# Allegro board 600-90527-01_CYW920719WCD1_REV2.0.brd
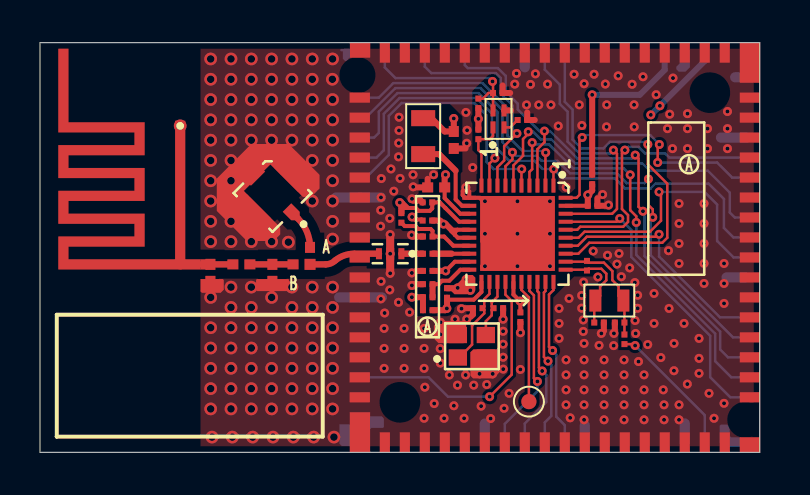
[diagram p0: board, top side]
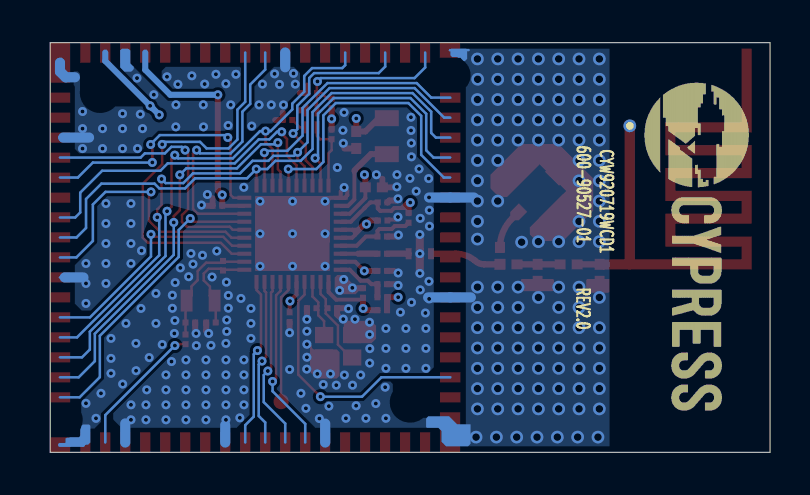
[diagram p1: board, bottom side, seen from below]

Outline 36 x 20.5 mm; copper layers: TOP, L02_GND, L03_PWR-GND, BOTTOM. Coordinates in mm from the lower left corner of the outline.
Outline path: 0,20.5 0,0 36,0 36,20.5 0,20.5

## Design rules (mm)
net group DP1: nets N16797345 N16797359
net group ANT: nets N16796101
net group PWR: nets 1P2VRF CBUCK_OUT N16792151 N16794447 VBAT VDDIO

## Placement (name value [footprint] x y rotation side)
A1  #  [ANT_ETCH_MIFA-0000_01]  6 13.15 90 top
C1  -  [CAPC0603_IS0201Q]  27.64 12.34 0 top
C3  -  [CAPC1005_IS0402Q]  20.69 15.63 270 top
C4  -  [CAPC1005_IS0402Q]  19.81 13.26 180 top
C5  -  [CAPC0603_IS0201Q]  19.39 10.8 0 top
C6  -  [CAPC0603_IS0201Q]  19.38 11.6 0 top
C7  -  [CAPC0603_IS0201Q]  19.38 12.51 180 top
C8  -  [CAPC0603_IS0201Q]  19.39 9.08 180 top
C10  -  [CAPC0603_IS0201Q]  22.92 7.21 0 top
C11  -  [CAPC0603_IS0201Q]  21.89 7.21 180 top
C14  -  [CAPC0603_IS0201Q]  24.03 6.76 270 top
C16  -  [CAPC0603_IS0201Q]  19.39 8.41 180 top
C18  -  [CAPC0603_IS0201Q]  20.36 7.97 90 top
C19  -  [CAPC0603_IS0201Q]  27.96 6.49 0 top
C20  -  [CAPC0603_IS0201Q]  28.99 6.49 180 top
C43  -  [CAPC0603_IS0201Q]  19.39 9.94 0 top
C61  -  [CAPC0603_IS0201Q]  24.13 16.63 0 top
C67  -  [CAPC1005_IS0402Q_OPT_AB_RA_M]  13.5 9.4 180 top
C68  -  [CAPC0603_IS0201Q]  22.9 17.98 0 top
FB1  -  [INDC0603_IS0201Q]  19.39 7.11 0 top
FB2  -  [INDC0603_IS0201Q]  19.39 7.76 0 top
FL1  -  [FILS3_MUR_LFB182G45Q]  17.51 9.94 180 top
J3  -  [AMPHL_A-1JB_ALT1]  11.63 12.97 45 top
L1  -  [BKPX_201210]  19.16 15.82 90 top
LC1  -  [CAPC1005_IS0402Q]  10.07 9.4 0 top
LC2  -  [CAPC1005_IS0402Q]  8.52 8.98 270 top
LC3  -  [CAPC1005_IS0402Q]  11.62 8.98 270 top
NOREF  -  []  -5.59 85.63 0 top
NOREF#2  -  []  361.74 -145.39 0 top
NOREF#3  -  []  36 0 90 top
NOREF#4  -  []  -336.76 -224.13 0 top
NOREF#5  -  []  -34.5 -53.95 0 top
NOREF#6  -  []  0 20.5 0 top
NOREF#7  -  []  82.34 42.57 0 top
NOREF#8  -  []  127.87 -9.4 90 top
NOREF#9  -  []  71.05 171.68 0 top
NOREF#10  -  []  361.74 -145.39 180 bottom
R1  -  [RESC0603_IS0201Q]  27.62 13.66 270 top
R9  -  [RESC0603_IS0201Q]  29.23 5.65 90 top
R15  -  [RESC0603_IS0201Q]  18.07 11.73 270 top
R16  -  [RESC0603_IS0201Q]  27.36 9.34 270 top
R82  -  [RESC0603_IS0201Q]  21.93 15.91 90 top
R83  -  [RESC0603_IS0201Q]  21.93 17.46 90 top
TP4  -  [TP-SMT-040-SQR]  24.45 2.54 270 top
U1  -  [QFN40P500X500_40_HS370_BCM]  23.88 10.94 270 top
U2  -  [QFN_36X18_5_64-0718]  17.25 0.49 90 top
U4  -  [XC6119_USPN4]  22.93 16.69 0 top
Y2  #  [9H03270044_2X1M2]  28.47 7.59 0 top
Y3  -  [XTALS4_2M0X1M6]  21.6 5.31 90 top

## Library data of the parts
A1 = ANT_ETCH_MIFA-0000_01: Tolerance: ?; User Part Number: *********; room: RF
C1 C14 C61 C68 = CAPC0603_IS0201Q: User Part Number: Part No; room: BASEBAND
C3 C4 LC1-LC3 = CAPC1005_IS0402Q: User Part Number: Part No; room: RF
C5-C8 C10 C11 C16 C18-C20 C43 = CAPC0603_IS0201Q: User Part Number: Part No; room: RF
C67 = CAPC1005_IS0402Q_OPT_AB_RA_M: User Part Number: Part No; room: RF
FB1 FB2 = INDC0603_IS0201Q: User Part Number: Part No; room: RF
FL1 = FILS3_MUR_LFB182G45Q: User Part Number: Part No; room: RF
J3 = AMPHL_A-1JB_ALT1: User Part Number: Part No; room: RF
L1 = BKPX_201210: User Part Number: Part No; room: RF
R1 R82 R83 = RESC0603_IS0201Q: User Part Number: Part No; room: BASEBAND
R9 R15 R16 = RESC0603_IS0201Q: User Part Number: Part No; room: RF
TP4 = TP-SMT-040-SQR: User Part Number: PART NUMBER; Tolerance: TOLERANCE; room: BASEBAND
U1 = QFN40P500X500_40_HS370_BCM: User Part Number: Part No; room: BASEBAND
U2 = QFN_36X18_5_64-0718
U4 = XC6119_USPN4: User Part Number: Part No; room: BASEBAND
Y2 = 9H03270044_2X1M2: Tolerance: ?; User Part Number: *********; room: RF
Y3 = XTALS4_2M0X1M6: User Part Number: Part No; room: RF

## Footprints (pads in the part's own frame, mm; a bottom-side part is the same pattern mirrored in y, then rotated)
9H03270044_2X1M2
  rect 0.6x1.1 smd: 1(-0.7,0) 2(0.7,0)
AMPHL_A-1JB_ALT1
  rect 0.75x1.7 smd: G1(-1.325,0) G3(1.325,0)
  rect 1x1 smd: G2(0,1.524)
  custom 0.6x0.75 smd: S(0,-1.399)
ANT_ETCH_MIFA-0000_01
  round 0.635 smd: FEED(-3.683,-1.016)
  round 0.635 hole 0.381: GND(3.188,-1.016)
BKPX_201210
  rect 0.8x1.2 smd: 1(-0.9,0) 2(0.9,0)
CAPC0603_IS0201Q
  rect 0.3x0.3 smd: 1(-0.24,0) 2(0.24,0)
CAPC1005_IS0402Q
  rect 0.55x0.5 smd: 1(-0.425,0) 2(0.425,0)
CAPC1005_IS0402Q_OPT_AB_RA_M
  rect 0.5x0.55 smd: A(0,-0.85)
  rect 0.55x0.5 smd: B(0.85,0)
  rect 0.55x0.55 smd: C(0,0)
FILS3_MUR_LFB182G45Q
  rect 0.3x0.55 smd: 1(-0.56,0) 3(0.56,0)
  rect 0.4x0.6 smd: 2(0,0)
INDC0603_IS0201Q
  rect 0.3x0.3 smd: 1(-0.24,0) 2(0.24,0)
QFN40P500X500_40_HS370_BCM
  rect 0.7x0.2 smd: 1(-2.41,1.8) 2(-2.41,1.4) 3(-2.41,1) 4(-2.41,0.6) 5(-2.41,0.2) 6(-2.41,-0.2) 7(-2.41,-0.6) 8(-2.41,-1) 9(-2.41,-1.4) 10(-2.41,-1.8) 21(2.41,-1.8) 22(2.41,-1.4) 23(2.41,-1) 24(2.41,-0.6) 25(2.41,-0.2) 26(2.41,0.2) 27(2.41,0.6) 28(2.41,1) 29(2.41,1.4) 30(2.41,1.8)
  rect 0.2x0.7 smd: 11(-1.8,-2.41) 12(-1.4,-2.41) 13(-1,-2.41) 14(-0.6,-2.41) 15(-0.2,-2.41) 16(0.2,-2.41) 17(0.6,-2.41) 18(1,-2.41) 19(1.4,-2.41) 20(1.8,-2.41) 31(1.8,2.41) 32(1.4,2.41) 33(1,2.41) 34(0.6,2.41) 35(0.2,2.41) 36(-0.2,2.41) 37(-0.6,2.41) 38(-1,2.41) 39(-1.4,2.41) 40(-1.8,2.41)
  rect 3.7x3.7 smd: H(0,0)
QFN_36X18_5_64-0718
  rect 1.016x0.508 smd: 63(0,0) 64(0,-1) 65(0,-2) 66(0,-3) 67(0,-4) 68(0,-5) 69(0,-6) 70(0,-7) 71(0,-8) 72(0,-9) 73(0,-10) 74(0,-11) 75(0,-12) 76(0,-13) 77(0,-14) 78(0,-15) 79(0,-16) 80(0,-17) 97(19.516,-17) 98(19.516,-16) 99(19.516,-15) 100(19.516,-14) 101(19.516,-13) 102(19.516,-12) 103(19.516,-11) 104(19.516,-10) 105(19.516,-9) 106(19.516,-8) 107(19.516,-7) 108(19.516,-6) 109(19.516,-5) 110(19.516,-4) 111(19.516,-3) 112(19.516,-2) 113(19.516,-1) 114(19.516,0)
  rect 0.508x1.016 smd: 81(2.26,-18.261) 82(3.26,-18.261) 83(4.26,-18.261) 84(5.26,-18.261) 85(6.26,-18.261) 86(7.26,-18.261) 87(8.26,-18.261) 88(9.26,-18.261) 89(10.26,-18.261) 90(11.26,-18.261) 91(12.26,-18.261) 92(13.26,-18.261) 93(14.26,-18.261) 94(15.26,-18.261) 95(16.26,-18.261) 96(17.26,-18.261) 115(17.26,1.254) 116(16.26,1.254) 117(15.26,1.254) 118(14.26,1.254) 119(13.26,1.254) 120(12.26,1.254) 121(11.26,1.254) 122(10.26,1.254) 123(9.26,1.254) 124(8.26,1.254) 125(7.26,1.254) 126(6.26,1.254) 127(5.26,1.254) 128(4.26,1.254) 129(3.26,1.254) 130(2.26,1.254)
  rect 2.007x1.016 smd: HS5(0.509,1.245) HS7(19.009,-18.26)
  rect 0.762x1.016 smd: HS6(-0.123,-18.26) HS8(19.639,1.24)
RESC0603_IS0201Q
  rect 0.3x0.3 smd: 1(-0.24,0) 2(0.24,0)
TP-SMT-040-SQR
  round 0.762 smd: 1(0,0)
XC6119_USPN4
  rect 0.25x0.6 smd: 1(-0.275,-0.425) 2(0.275,-0.425) 3(0.275,0.425) 4(-0.275,0.425)
XTALS4_2M0X1M6
  rect 0.813x0.914 smd: 1(-0.563,0.7) 2(-0.563,-0.7) 3(0.563,-0.7) 4(0.563,0.7)

## Nets
GND: A1.FEED A1.GND C1.2 C3.2 C4.2 C5.1 C6.1 C7.2 C8.2 C10.2 C11.2 C14.2 C16.2 C18.2 C19.2 C20.2 C61.2 C68.2 FL1.2 J3.G1 J3.G2 J3.G3 LC1.1 LC2.1 LC2.2 LC3.2 U1.11 U1.H U2.68 U2.73 U2.78 U2.80 U2.87 U2.94 U2.99 U2.107 U2.120 U2.125 U2.HS5 U2.HS6 U2.HS7 U2.HS8 U4.3 Y3.2 Y3.4
VBAT: C4.1 U1.13 U2.98
VDDIO: R1.1 R82.2 R83.1 U2.100
1P2VRF: C7.1 FB1.1 FB2.1 R15.1 U1.14
BT_RFIO: C43.2 U1.18
BT_UART_CTS: U1.30 U2.72
BT_UART_RTS: U1.29 U2.71
BT_UART_RX: U1.27 U2.69
BT_UART_TX: U1.28 U2.70
CBUCK_OUT: C3.1 C6.2 L1.2 U1.15 U1.16
EXT_LPO: R9.1 U2.79
HOST_WAKE: U1.24 U2.129
P0: U1.3 U2.83 U2.110
P1: U1.4 U2.82
P2: U1.34 U2.85
P4: U1.35 U2.88
P6: U1.36 U2.93
P7: U1.37 U2.81
P10: U1.40 U2.92
P16: U1.33 U2.105
P17: U1.38 U2.106
P25: U1.8 U2.112
P26: U1.7 U2.84 U2.116
P28: U1.1 U2.89 U2.117
P29: U1.2 U2.115
P33: U1.9 U2.118
P34: U1.5 U2.119
P38: U1.6 U2.90
PAVDD: C5.2 R15.2 U1.17
RST_N: C68.1 R83.2 U2.114 U4.4
N16791364: C1.1 C14.1 R1.2 U1.25 U1.39
N16791782: TP4.1 U1.26
N16792151: C16.1 FB2.2 U1.20
N16792311: C8.1 C18.1 FB1.2 U1.19 U1.21
N16794447: L1.1 U1.12
N16796101: C67.B LC1.2 LC3.1
N16797345: C20.1 R9.2 R16.1 U1.32 Y2.2
N16797359: C19.1 R16.2 U1.31 Y2.1
N16808527: R82.1 U1.10 U4.1
N16808543: C61.1 U4.2
N16812960: C43.1 FL1.1
N16812974: C67.C FL1.3
N16813232: C67.A J3.S
N16813357: C11.1 U1.22 Y3.1
N16813361: C10.1 U1.23 Y3.3

Pads without a net: U2 63 64 65 66 67 74 75 76 77 86 91 95 96 97 101 102 103 104 108 109 111 113 121 122 123 124 126 127 128 130

## Via types
v1: diameter 0.45, hole 0.2, TOP to BOTTOM, 252 vias
v2: diameter 0.635, hole 0.381, TOP to BOTTOM, 108 vias

## Routing (per net, layer and track width the routed paths; a pad name or vN(x,y) marks a point on that pad's centre or on a via; arc(x,y) is an arc through that point)
GND: length 31.6
  TOP w0.2: 11.62,8.05 11.62,8.55 ; 21.14,13.09 21.14,12.87 21.27,12.74 U1.11 ; U1.11 22.01,12.74 ; U1.11 21.47,13.07 ; v1(18.61,11.78) 18.74,11.65 19.09,11.65 C6.1 ; 23.16,6.63 v1(23.16,6.66)
  TOP w0.3: v1(18.6,8.35) 18.66,8.41 C16.2 ; C18.2 20.87,8.21 v1(20.89,8.23) ; 24.37,17.01 C61.2 24.74,16.63 ; 21.55,6.79 21.65,6.9 C11.2 21.1,7.21 v1(21.08,7.19) ; 27.88,12.72 C1.2 28.26,12.34 ; 23.52,17.98 C68.2 23.14,18.36 ; C10.2 v1(23.16,6.66) ; 18.59,12.69 18.68,12.6 19.04,12.6 19.13,12.51 C7.2 ; C8.2 18.81,9.08 ; U4.3 23.56,17.11 ; C14.2 v1(24.03,5.98) ; C5.1 18.66,10.8 v1(18.58,10.87) ; v1(28.07,5.95) 28.2,6.07 C19.2 ; 20.69,15.21 21.28,15.21 ; 19.39,13.69 C4.2 18.69,13.26 v1(18.66,13.29) ; C20.2 28.75,5.99 v1(28.7,5.95)
  TOP w0.318: LC1.1 LC2.1 7.08,9.4 A1.FEED
  TOP w0.4: v1(17.51,10.9) v1(17.51,9.94) v1(17.51,8.96)
  BOTTOM w0.125: U2.HS8 15.08,20.13 ; 35.27,8.75 U2.87
  BOTTOM w0.2: U2.HS6 34.37,0.37 U2.80 ; 35.35,15.75 U2.94
  BOTTOM w0.508: 34.06,15.75 35.35,15.75 ; U2.HS7 35.51,19.05 35.22,18.77 34.77,18.77 ; 27.25,1.36 U2.73 ; 17.1,7.75 U2.125 14.96,7.75 ; 14.81,12.75 U2.120 17.05,12.75 ; 22.25,1.43 U2.68 ; 34.34,8.75 35.27,8.75 ; U2.78 32.25,1.44 ; U2.107 24.25,19.27
  vias: v1(17.07,13.7) v1(17.05,12.76) v1(17.04,12.12) v1(17.03,11.31) v1(17.06,8.56) v1(17.05,7.68) v1(17.21,6.2) v1(17.21,5.2) v1(17.21,4.2) v1(17.24,6.97) v1(17.49,11.71) v1(17.49,8.13) v1(17.55,14.18) v1(17.69,13.07) v1(17.96,16.77) v1(17.95,16.11) v1(17.94,15.48) v1(17.93,14.79) v1(18.01,13.71) v1(17.93,7.5) v1(18.21,6.2) v1(18.21,5.2) v1(18.21,4.2) v1(18.48,7.01) v1(18.61,12.69) v1(18.6,8.98) v1(18.66,13.89) v1(19.21,6.2) v1(19.21,5.2) v1(19.21,4.2) v1(19.21,1.7) v1(19.25,3.26) v1(19.69,13.89) v1(19.71,2.44) v1(20.03,6.51) v1(20.02,5.9) v1(20.02,5.19) v1(20.02,4.46) v1(20.21,1.7) v1(20.47,3.87) v1(20.7,2.33) v1(20.76,6.66) v1(20.88,3.36) v1(21.21,1.7) v1(21.3,17.01) v1(21.3,13.25) v1(21.29,3.87) v1(21.36,16.12) v1(21.34,15.47) v1(21.32,8.65) v1(21.34,6.66) v1(21.52,8.1) v1(21.64,14.25) v1(21.69,3.36) v1(21.98,3.93) v1(22.06,2.31) v1(22.25,12.56) v1(22.25,10.94) v1(22.25,9.31) v1(22.34,3.39) v1(22.54,1.69) v1(22.64,3.93) v1(23.16,6.06) v1(23.16,5.41) v1(23.16,4.76) v1(23.17,4.16) v1(23.21,2.2) v1(23.46,2.95) v1(23.74,18.43) v1(23.83,18.96) v1(23.88,12.56) v1(23.88,10.94) v1(23.88,9.31) v1(24.03,4.15) v1(24.33,17.39) v1(24.53,18.41) v1(24.78,18.94) v1(24.94,17.39) v1(25.39,18.43) v1(25.5,12.56) v1(25.5,10.94) v1(25.5,9.31) v1(25.55,17.39) v1(25.92,16.33) v1(25.96,7.2) v1(25.96,6.45) v1(25.96,5.7) v1(26.32,13.26) v1(26.31,4.62) v1(26.31,3.87) v1(26.31,3.12) v1(26.31,2.38) v1(26.46,7.7) v1(26.52,1.72) v1(26.71,18.92) v1(26.97,17.39) v1(27.1,16.36) v1(27.09,7.85) v1(27.09,7.21) v1(27.19,8.51) v1(27.17,6.62) v1(27.17,6.05) v1(27.21,5.45) v1(27.21,4.62) v1(27.21,3.87) v1(27.21,3.12) v1(27.21,2.38) v1(27.21,1.62) v1(27.21,18.45) v1(27.67,10.07) v1(27.71,18.92) v1(27.9,8.77) v1(27.96,5.35) v1(28.14,12.9) v1(28.21,4.62) v1(28.21,3.87) v1(28.21,3.12) v1(28.21,2.38) v1(28.21,1.62) v1(28.27,18.43) v1(28.34,17.39) v1(28.33,16.29) v1(28.38,9.86) v1(28.43,12.37) v1(28.69,5.34) v1(28.86,9.42) v1(28.92,18.84) v1(28.96,9.95) v1(29.07,8.79) v1(29.21,4.62) v1(29.21,3.87) v1(29.21,3.12) v1(29.21,2.38) v1(29.21,1.62) v1(29.49,9.23) v1(29.61,18.42) v1(29.71,17.39) v1(29.72,16.29) v1(29.75,8.49) v1(29.76,6.59) v1(29.79,5.95) v1(29.89,7.86) v1(29.89,7.21) v1(29.93,4.54) v1(30.16,18.8) v1(30.21,3.87) v1(30.21,3.12) v1(30.21,2.38) v1(30.21,1.62) v1(30.4,5.39) v1(30.71,7.95) v1(30.71,6.45) v1(30.82,17.9) v1(31.05,4.74) v1(31.17,3.12) v1(31.21,2.38) v1(31.21,1.62) v1(31.38,16.2) v1(31.49,16.92) v1(31.43,10.09) v1(31.46,7.2) v1(31.66,18.73) v1(31.63,15.2) v1(31.71,4.08) v1(31.71,5.45) v1(31.96,12.45) v1(31.96,11.45) v1(31.96,10.45) v1(31.96,9.45) v1(31.96,2.38) v1(31.96,1.62) v1(32.21,6.45) v1(32.38,16.95) v1(32.38,16.2) v1(32.38,15.2) v1(32.38,3.41) v1(32.96,5.7) v1(32.96,4.7) v1(32.96,3.95) v1(33.21,12.45) v1(33.21,11.45) v1(33.21,10.45) v1(33.21,9.45) v1(33.21,8.45) v1(33.38,16.2) v1(33.38,15.2) v1(33.46,2.95) v1(33.71,1.7) v1(34.21,9.45) v1(34.21,8.45) v1(34.21,7.45) v1(34.21,2.45) v1(34.38,17.06) v1(34.38,16.2) v1(34.38,15.2) v2(8.54,19.69) v2(8.54,18.67) v2(8.54,17.66) v2(8.54,16.64) v2(8.54,15.62) v2(8.54,14.61) v2(8.54,13.59) v2(8.54,12.58) v2(8.54,11.56) v2(8.54,10.54) v2(8.54,7.75) v2(8.54,6.23) v2(8.54,5.22) v2(8.54,4.2) v2(8.54,3.19) v2(8.54,2.17) v2(8.6,0.76) v2(9.55,19.69) v2(9.55,18.67) v2(9.55,17.66) v2(9.55,16.64) v2(9.55,15.62) v2(9.55,14.61) v2(9.55,13.59) v2(9.55,11.56) v2(9.55,10.54) v2(9.55,8.27) v2(9.55,7.25) v2(9.55,6.23) v2(9.55,5.22) v2(9.55,4.2) v2(9.55,3.19) v2(9.55,2.17) v2(9.62,0.76) v2(10.57,19.69) v2(10.57,18.67) v2(10.57,17.66) v2(10.57,16.64) v2(10.57,15.62) v2(10.57,10.54) v2(10.57,8.27) v2(10.57,7.25) v2(10.57,6.23) v2(10.57,5.22) v2(10.57,4.2) v2(10.57,3.19) v2(10.57,2.17) v2(10.64,0.76) v2(11.58,19.69) v2(11.58,18.67) v2(11.58,17.66) v2(11.58,16.64) v2(11.58,15.62) v2(11.58,10.54) v2(11.58,7.75) v2(11.58,6.23) v2(11.58,5.22) v2(11.58,4.2) v2(11.58,3.19) v2(11.58,2.17) v2(11.65,0.76) v2(12.42,10.52) v2(12.6,19.69) v2(12.6,18.67) v2(12.6,17.66) v2(12.6,16.64) v2(12.6,15.62) v2(12.6,8.27) v2(12.6,7.25) v2(12.6,6.23) v2(12.6,5.22) v2(12.6,4.2) v2(12.6,3.19) v2(12.6,2.17) v2(12.67,0.76) v2(13.62,19.69) v2(13.62,18.67) v2(13.62,17.66) v2(13.62,16.64) v2(13.62,15.62) v2(13.62,14.61) v2(13.62,12.58) v2(13.62,8.27) v2(13.62,7.25) v2(13.62,6.23) v2(13.62,5.22) v2(13.62,4.2) v2(13.62,3.19) v2(13.62,2.17) v2(13.68,0.76) v2(14.63,19.69) v2(14.62,18.67) v2(14.63,17.66) v2(14.63,16.64) v2(14.63,15.62) v2(14.63,14.61) v2(14.63,13.59) v2(14.63,12.58) v2(14.63,11.56) v2(14.63,10.67) v2(14.63,8.27) v2(14.63,7.25) v2(14.63,6.23) v2(14.63,5.22) v2(14.63,4.2) v2(14.63,3.19) v2(14.63,2.17) v2(14.7,0.76)
VBAT: length 19.3
  TOP w0.2: U1.13 21.02,11.94 20.24,12.72 C4.1
  TOP w0.3: v1(20.28,13.89) 20.24,13.85 C4.1
  L03_PWR-GND w0.3: v1(31,17.34) 30.59,16.93 v1(30.55,16.89) 23.51,16.89 20.51,13.89 v1(20.28,13.89)
  BOTTOM w0.3: v1(31,17.34) 30.88,17.23 ; 30.88,17.23 30.59,16.93 v1(30.55,16.89) ; 30.88,17.23 33.25,19.59 U2.98
VDDIO: length 16.3
  TOP w0.3: v1(27.62,17.89) R1.1 ; R83.1 v1(21.93,16.69) R82.2
  L03_PWR-GND w0.3: v1(27.62,17.89) 23.13,17.89 v1(21.93,16.69)
  BOTTOM w0.3: v1(27.62,17.89) 29.99,17.89 31.25,19.14 U2.100
1P2VRF: length 11.6
  TOP w0.2: 18.42,12.23 18.08,12.23 18.07,12.22 ; 18.42,12.23 18.79,12.23 18.94,12.08 19.49,12.08 19.62,12.21 C7.1 19.99,12.51 20.28,12.22 20.96,11.54 U1.14 ; 18.42,12.23 18.15,12.5 v1(17.99,12.5)
  TOP w0.3: v1(18.6,7.76) FB2.1 FB1.1 ; R15.1 18.07,12.42 v1(17.99,12.5)
  L03_PWR-GND w0.3: v1(17.99,12.5) 18.03,12.46 18.03,8.21 18.48,7.76 v1(18.6,7.76)
BT_RFIO: length 1.8
  TOP w0.125: 19.65,9.94 C43.2
  TOP w0.2: U1.18 20.58,9.94
  TOP w0.318: 20.58,9.94 19.65,9.94
BT_UART_CTS: length 8.5
  TOP w0.125: v1(25.64,5.09) 25.46,5.27 25.46,7.9 25.68,8.12 25.68,8.53
  BOTTOM w0.125: v1(25.64,5.09) 25.82,4.91 25.82,1.78 26.25,1.36 U2.72
BT_UART_RTS: length 8.4
  TOP w0.125: v1(25.41,4.56) 25.2,4.77 25.2,8 25.28,8.07 25.28,8.53
  BOTTOM w0.125: U2.71 25.25,1.49 25.57,1.82 25.57,4.4 v1(25.41,4.56)
BT_UART_RX: length 8.9
  TOP w0.125: U1.27 24.48,8.08 24.7,7.86 24.7,3.71 24.86,3.54 v1(24.88,3.54)
  BOTTOM w0.125: v1(24.88,3.54) 24.88,3.05 23.25,1.42 U2.69
BT_UART_TX: length 8.7
  TOP w0.125: v1(25.12,4.07) 24.95,4.23 24.95,7.99 24.88,8.06 U1.28
  BOTTOM w0.125: U2.70 24.25,1.44 25.32,2.51 25.32,3.87 v1(25.12,4.07)
CBUCK_OUT: length 12.2
  TOP w0.2: 20.88,11.14 20.75,11.02 20.75,10.88 ; 20.88,11.14 20.57,11.14 ; 20.88,11.14 U1.15 ; 20.57,11.14 20.56,11.16 ; 20.57,11.14 20.57,11.06 20.75,10.88 ; 20.75,10.88 20.9,10.74 U1.16
  TOP w0.3: C6.2 20.01,11.6 v1(20.18,11.42) 20.29,11.42 20.56,11.16 ; v1(20.69,16.71) C3.1 20.24,16.06 19.57,16.72 L1.2
  L03_PWR-GND w0.3: v1(20.18,11.42) 19.19,12.42 19.19,14.31 20.69,15.82 v1(20.69,16.71)
EXT_LPO: length 6.9
  TOP w0.125: v1(29.76,5.34) 29.69,5.41 R9.1
  BOTTOM w0.125: v1(29.76,5.34) 33.25,1.86 U2.79
HOST_WAKE: length 13.2
  TOP w0.125: v1(22.49,2.78) 23.59,3.89 23.59,7.58 23.28,7.89 23.28,8.53
  BOTTOM w0.125: v1(22.49,2.78) 20.4,2.78 19.43,3.75 U2.129
P0: length 27.8
  TOP w0.125: v1(30.16,12.06) 29.94,12.29 29.94,14.71 v1(29.77,14.87) ; U1.3 24.88,15.17 25.23,15.52 v1(25.23,16.08)
  BOTTOM w0.125: U2.83 34.41,4.75 34.02,5.14 34.02,6.04 30.23,9.82 30.23,11.99 v1(30.16,12.06) ; v1(29.77,14.87) 29.61,14.71 26.87,14.71 25.51,16.08 v1(25.23,16.08) 24.98,16.08 23.89,17.16 23.89,17.45 23.3,18.05 23.3,18.84 22.9,19.23 21.39,19.23 21.25,19.38 U2.110
P1: length 20.9
  TOP w0.125: v1(24.61,15.5) 24.61,14.17 24.48,14.03 U1.4 ; v1(29.82,11.5) 29.82,11.81 29.52,12.12 v1(29.52,13.89)
  BOTTOM w0.125: U2.82 34.58,3.75 33.77,4.56 33.77,5.93 29.82,9.88 v1(29.82,11.5) ; v1(29.52,13.89) 29.19,14.21 26.66,14.21 25.46,15.41 24.7,15.41 v1(24.61,15.5)
P2: length 11.8
  TOP w0.125: U1.34 26.9,10.34 27.35,10.79 30.84,10.79 v1(30.96,10.91)
  BOTTOM w0.125: v1(30.96,10.91) 30.96,9.8 34.01,6.75 U2.85
P4: length 13.6
  TOP w0.125: v1(30.96,13.03) 31.06,12.94 31.06,11.59 30.51,11.04 27.23,11.04 26.93,10.74 U1.35
  BOTTOM w0.125: v1(30.96,13.03) 33.23,13.03 33.87,12.4 33.87,10.58 34.69,9.75 U2.88
P6: length 13.6
  TOP w0.125: v1(29.25,15.12) 29.11,14.98 29.11,12.18 29.41,11.87 29.41,11.53 29.17,11.29 27.02,11.29 26.87,11.14 U1.36
  BOTTOM w0.125: v1(29.25,15.12) 29.41,15.29 29.94,15.29 30.27,14.96 31.27,14.96 31.48,14.75 U2.93
P7: length 15
  TOP w0.125: U1.37 28.83,11.54 v1(29,11.7)
  BOTTOM w0.125: v1(29,11.7) 29.57,11.13 29.57,9.78 33.52,5.83 33.52,3.76 34.53,2.75 U2.81
P10: length 13.7
  TOP w0.125: v1(27.12,15.76) 26.98,15.62 26.98,12.89 26.83,12.74 U1.40 ; v1(30.97,15.4) 30.89,15.32 v1(30.89,14.51)
  BOTTOM w0.125: v1(27.12,15.76) 27.23,15.88 30.52,15.88 30.97,15.42 30.97,15.41 v1(30.97,15.4) ; U2.92 34.61,13.75 33.86,14.5 30.89,14.5 v1(30.89,14.51)
P16: length 19.1
  TOP w0.125: U1.33 26.92,9.94 27.47,10.49 31.12,10.49 31.37,10.74 31.37,13.44 30.4,14.42 v1(30.4,15.41)
  BOTTOM w0.125: U2.105 26.25,17.54 26.64,17.15 26.64,15.65 27.08,15.21 28.18,15.21 28.51,15.54 30.27,15.54 v1(30.4,15.41)
P17: length 13.2
  TOP w0.125: U1.38 28.61,11.94 28.86,12.18 28.86,14.95 v1(28.68,15.12)
  BOTTOM w0.125: v1(28.68,15.12) 28.51,14.96 26.98,14.96 26.39,15.55 26.39,17.05 26,17.44 26,18.4 25.25,19.15 U2.106
P25: length 10.9
  TOP w0.125: v1(23.85,15.96) 23.21,15.32 23.21,14.61 22.88,14.27 U1.8
  BOTTOM w0.125: v1(23.85,15.96) 23.64,16.17 23.64,17.35 23.05,17.94 23.05,18.73 22.8,18.98 19.57,18.98 19.25,19.3 U2.112
P26: length 30.5
  TOP w0.125: v1(30.43,13.68) 30.43,12.37 30.65,12.16 v1(30.65,11.76) ; v1(23.63,15.01) 23.63,14.66 23.28,14.32 23.28,13.35
  BOTTOM w0.125: v1(30.43,13.68) 30.22,13.47 29.35,13.47 28.86,13.96 26.51,13.96 25.88,14.59 25.09,14.59 24.84,14.84 23.81,14.84 23.63,15.01 v1(23.63,15.01) 23.63,15.02 23.13,15.51 23.13,17.13 22.03,18.23 17.77,18.23 16.3,16.75 U2.116 ; U2.84 34.66,5.75 30.55,9.86 30.55,11.66 30.64,11.76 v1(30.65,11.76)
P28: length 27
  TOP w0.125: 25.68,13.35 25.68,14.16 v1(25.69,14.18)
  BOTTOM w0.125: U2.89 34.68,10.75 34.21,11.23 34.21,12.68 33.44,13.45 30.78,13.45 30.54,13.21 29.26,13.21 28.75,13.71 26.16,13.71 v1(25.69,14.18) 25.15,14.18 24.73,14.59 23.47,14.59 22.88,15.18 22.88,17.03 21.93,17.98 17.88,17.98 16.95,17.05 16.95,15.99 16.71,15.75 U2.117
P29: length 13.5
  TOP w0.125: v1(25.29,15) 25.28,14.99 25.28,13.35
  BOTTOM w0.125: U2.115 16.94,17.75 17.67,18.48 22.13,18.48 23.38,17.23 23.38,15.85 24.14,15.09 25.2,15.09 v1(25.29,15)
P33: length 13
  TOP w0.125: U1.9 22.48,14.45 v1(22.75,14.72)
  BOTTOM w0.125: U2.118 16.83,14.75 17.2,15.12 17.2,16.94 17.98,17.73 21.82,17.73 22.61,16.95 22.61,14.87 v1(22.75,14.72)
P34: length 14.4
  TOP w0.125: U1.5 24.08,14.16 v1(24.09,14.18)
  BOTTOM w0.125: v1(24.09,14.18) 22.69,14.18 22.34,14.53 22.34,16.86 21.72,17.48 18.08,17.48 17.45,16.84 17.45,14.89 16.31,13.75 U2.119
P38: length 16.4
  TOP w0.125: 23.68,13.35 23.68,14.36 24.16,14.84 24.16,15.68 24.42,15.94 v1(24.42,16.04)
  BOTTOM w0.125: U2.90 34.75,11.75 34.5,12 34.5,12.99 33.4,14.09 30.49,14.09 30.12,14.46 26.77,14.46 25.57,15.66 25.04,15.66 24.66,16.04 v1(24.42,16.04)
PAVDD: length 4
  TOP w0.2: U1.17 20.67,10.34 20.21,10.8 C5.2 19.63,11.08 19.54,11.17 18.92,11.17 18.77,11.32 18.24,11.32 R15.2
RST_N: length 8.7
  TOP w0.125: C68.1 22.43,17.98 22.15,17.7 R83.2 ; C68.1 22.66,18.54 v1(22.63,18.56) ; C68.1 U4.4
  BOTTOM w0.125: U2.114 17.25,19.26 17.78,18.73 22.47,18.73 v1(22.63,18.56)
N16791364: length 11.6
  TOP w0.2: 23.68,8.53 23.68,7.89 v1(24.01,7.57) 24.03,7.55 C14.1 ; 27.39,12.89 v1(27.4,12.88) ; U1.39 C1.1
  TOP w0.3: R1.2 27.62,13.1 v1(27.4,12.88) 27.4,12.88 C1.1
  L03_PWR-GND w0.3: v1(24.01,7.57) 25.53,7.57 26.89,8.92 26.89,11.75 27.4,12.26 v1(27.4,12.88)
N16791782: length 6.1
  TOP w0.125: TP4.1 24.45,7.75 24.08,8.12 U1.26
N16792151: length 2.8
  TOP w0.2: U1.20 21.02,9.14 20.47,8.59 20.11,8.59 19.94,8.41 C16.1
  TOP w0.3: FB2.2 C16.1
N16792311: length 7.6
  TOP w0.2: v1(20.29,9.08) 20.75,9.54 U1.19 ; U1.21 22.08,8.02 21.69,7.64 20.45,7.64 C18.1
  TOP w0.3: C18.1 20.36,7.21 v1(20.35,7.2) 20.26,7.11 FB1.2 ; v1(20.29,9.08) C8.1
  L03_PWR-GND w0.3: v1(20.35,7.2) 20.35,9.02 v1(20.29,9.08)
N16794447: length 4.2
  TOP w0.2: U1.12 21.1,12.34 20.79,12.65 20.79,14.1
  TOP w0.3: L1.1 19.96,14.92 20.79,14.1
N16796101: length 2.2
  TOP w0.318: LC1.2 LC3.1 C67.B
N16797345: length 6
  TOP w0.125: R9.2 C20.1 29.23,7.54 Y2.2 28.94,7.83 28.94,8.3 28.63,8.61 28.63,9.07 28.2,9.49 27.44,9.49 R16.1 27.32,9.54 U1.32
N16797359: length 4.9
  TOP w0.125: C19.1 27.72,7.54 Y2.1 28.01,7.83 28.01,8.3 28.32,8.61 28.32,8.94 28.08,9.19 27.44,9.19 R16.2 27.32,9.14 U1.31
N16808527: length 3.6
  TOP w0.125: U4.1 22.66,15.83 22.5,15.67 R82.1 21.93,15.12 22.08,14.97 U1.10
N16808543: length 0.8
  TOP w0.125: U4.2 23.52,16.26 C61.1
N16812960: length 1.1
  TOP w0.125: C43.1 19.14,9.94
  TOP w0.318: 19.14,9.94 FL1.1
N16812974: length 3.6
  TOP w0.318: C67.C 14.29,9.4 arc(14.55,9.46) 14.77,9.6 arc(15.22,9.85) 15.72,9.94 FL1.3
N16813232: length 2
  TOP w0.318: J3.S 12.91,11.69 arc(13.35,11.03) C67.A
N16813357: length 4.5
  TOP w0.125: U1.22 22.48,7.93 22.22,7.67 22.22,7.3 C11.1 22.22,7.12 22.22,6.95 21.61,6.34 21.61,5.39 20.96,4.74 Y3.1
N16813361: length 3
  TOP w0.125: Y3.3 22.3,6.56 22.59,6.85 22.59,7.12 C10.1 22.59,7.3 22.59,7.51 22.88,7.79 U1.23

## Copper pours and planes (outline as drawn; the poured copper is in the pictures)
GND on TOP (solid shape): 21.31,6.5 21.31,5.6 21.18,5.46 19.93,5.46 19.7,5.69 19.7,6.34 19.94,6.58 21.24,6.58
GND on TOP (solid shape): 21.77,8.74 21.77,8.1 21.58,7.91 20.73,7.91 20.5,8.14 20.5,8.27 20.57,8.33 20.77,8.33 21.1,8.66 21.1,8.74 21.23,8.87 21.64,8.87
GND on TOP (solid shape): 25.75,12.83 25.75,9.08 22.02,9.08 22.02,9.37 22.28,9.37 22.28,10.5 22.02,10.5 22.02,12.57 21.86,12.72 21.86,12.8 21.89,12.83
GND on TOP (solid shape): 23.01,5.33 23.01,4.03 22.67,3.69 21.67,3.69 21.53,3.83 21.53,5.01 21.67,5.15 22.83,5.15 22.91,5.23 22.91,5.36 22.93,5.38 22.96,5.38
GND on TOP (solid shape): 13.98,13.89 13.98,13.21 13.55,12.78 13.15,12.78 11.52,14.41 10.19,13.08 12.01,11.26 12.01,10.9 11.69,10.58 10.34,10.58 8.84,12.08 8.84,13.7 10.57,15.43 12.44,15.43
GND on TOP (solid shape): 1.42,16.52 5.23,16.52 5.23,14.87 1.42,14.87 1.42,14.23 5.23,14.23 5.23,12.58 1.42,12.58 1.42,11.94 5.23,11.94 5.23,10.29 1.42,10.29 1.42,9.66 6.76,9.66 6.76,16.59 7.27,16.59 7.27,9.66 8.03,9.66 8.03,9.15 0.92,9.15 0.92,10.8 4.73,10.8 4.73,11.44 0.92,11.44 0.92,13.09 4.73,13.09 4.73,13.72 0.92,13.72 0.92,15.37 4.73,15.37 4.73,16.01 0.92,16.01 0.92,20.2 1.42,20.2
GND on BOTTOM (solid shape): 17.2,1.69 17.2,1.26 17.16,1.22 16.59,1.22 16.43,1.07 16.43,0.53 16.2,0.3 15.1,0.3 14.98,0.43 14.98,1.4 15.65,1.4 16.05,1.8 17.09,1.8
GND on TOP: 8.03,0.3 8.03,8.69 10.02,8.69 10.32,8.98 10.32,9.72 9.92,10.12 9.24,10.12 9.24,10.14 8.03,10.14 8.03,20.2 35.7,20.2 35.7,0.3 ; 30 cut-outs
GND on BOTTOM: 34.77,13.54 34.02,13.54 33.81,13.75 33.76,13.74 33.68,13.68 33.7,13.57 33.73,13.54 33.73,12.27 34.03,11.96 34.77,11.96 34.77,9.78 34.57,9.57 34.77,9.37 34.77,7.44 34.42,7.09 33.54,7.09 34.24,6.39 35.7,6.39 35.7,0.3 34.52,0.3 34.52,0.8 34.13,1.18 33.8,1.18 32.84,2.13 32.84,1.63 32.44,1.22 26.68,1.22 26.28,1.63 25.96,1.31 25.96,1.22 23.83,1.22 23.29,1.77 22.74,1.22 16.82,1.22 16.82,1.72 17.49,1.72 17.5,1.71 17.81,2.03 17.81,3.61 17.8,3.62 16.82,3.62 16.82,3.84 17.23,3.84 16.82,4.25 16.82,14.56 17.24,14.99 17.24,17.7 16.4,18.55 16.4,18.79 16.23,18.96 15.66,18.96 15.27,18.57 15.27,18.36 15.21,18.41 15.21,0.3 8.03,0.3 8.03,20.2 21.67,20.2 21.67,19.16 21.6,19.09 22.02,18.68 22.78,18.68 22.78,19.13 22.95,19.3 23.01,19.3 23.01,19.01 23.27,18.76 23.34,18.76 23.51,18.92 23.51,18.99 23.82,19.3 24.8,19.3 25.11,18.99 25.41,19.3 25.55,19.3 25.55,19.17 26.12,18.6 26.12,18.9 26.52,19.3 30.21,19.3 30.43,19.08 30.43,18.69 30.65,18.69 30.98,19.02 30.98,19.41 30.99,19.42 30.99,20.2 31.18,20.2 31.18,19.11 31.41,18.88 31.95,19.42 32.28,19.42 32.28,20.1 32.18,20.2 34.32,20.2 34.32,19.39 33.52,19.39 33.52,19.12 33.79,18.84 33.69,18.74 33.69,18.6 34.3,17.99 34.51,17.99 34.51,18.96 34.62,19.07 35,19.07 35.24,19.31 35.24,20.2 35.7,20.2 35.7,19.01 35.51,19.01 34.98,18.48 34.93,18.48 34.77,18.32 34.77,15.19 34.3,14.72 34.33,14.69 34.77,14.69 ; 10 cut-outs
GND on L02_GND: 8.03,0.3 8.03,10.54 6.5,10.54 6.5,20.2 35.7,20.2 35.7,0.3
GND on L03_PWR-GND: 8.03,0.3 8.03,20.2 35.7,20.2 35.7,0.3

Small or netless copper shapes (teardrops, artwork), in the pictures only: 3 on TOP, 4 on BOTTOM

## Text on the board
BOTTOM: BOTTOM SIDE
Ref Des/Assembly Bottom: 63 | 130 | 114 | 115 | 81 | 80 | 97 | 96 | ASSEMBLY BOTTOM | 620-90527-01
Board Geometry/Soldermask Bottom: SOLDERMASK BOTTOM
Ref Des/Silkscreen Bottom: REV2.0 | CYW920719WCD1 | 600-90527-01 | SILKSCREEN BOTTOM
TOP: TOP SIDE
Ref Des/Assembly Top: ASSEMBLY TOP | 620-90527-01
Board Geometry/Soldermask Top: SOLDERMASK TOP
Ref Des/Silkscreen Top: A | 1 | SILKSCREEN TOP
L02_GND: LO2_GND SIDE
L03_PWR-GND: L03_PWR-GND SIDE
PAGE_OUTLINE: SOLDERPASTE TOP
DIMENSION: SOLDERPASTE BOTTOM | Dimensions are in metric | with inches in brackets.
User.6: GOLDMASK TOP
User.7: GOLDMASK BOTTOM
User.9: 1. 16p6 11/04/2013 F.H.: | 2. 16p6 11/13/2013 F.H.: | 3. 16p6 12/09/2013 F.H.: | 4. 16p6 07/28/2014 F.H.: | 5. 16p6 11/13/2014 F.H.: | 6. 16p# ##/##/201# X.X.: | A. CREATED StartJob_Allegro_16p6.brd FROM StartJob_Allegro_16p5.brd | B. CREATED BOARD GEOMETRY "REV" SUBCLASS FOR TRACKING REV CHANGES TO THIS DATABASE | C. ADDED GOLDMASK FILM LAYERS | D. ADDED TOOLING HOLE SYMBOL MTGHOLE_D320N TO DATABASE | E. SET SOLDERMASK DRC CHECKING TO OFF, CLINE TO SM PAD CHECK TO NE DONE AT FINAL QC | F. CREATED STANDARD SPACING CLASSES IN CONSTRAINT MANAGER TO SUPPORT BRCM NAMING STANDARD | G. CREATED STANDARD CLASS TO CLASS SPACING FOR CRITICAL_2X AND CRITICAL_3X TO PWR | A. REFRESHED FAB STACK-UP SYMBOL THAT NOW SUPPORTS IMPEDANCE REFERENCE LAYER AND COPLANAR SPACING. | A. ADDED BOARD GEOMETRY SUBCLASSES FAB_TITLEDATA2 AND FAB_TITLEDATA3 TO SUPPORT FAB DRAWING DATA ON MECHANICAL SYMBOLS | A. UPDATED FAB_NOTES SYMBOL | A. UPDATED FAB_NOTES AND FAB_TITLE SYMBOLS TO INCORPORATE UNIFORM PART NUMBERING | B. UPDATED CONSTRAINT RULE NAMES TO REFLECT NEW BRCM PREFERRED PRACTICES DOCUMENT | A. REV | ALLEGRO START JOB UPDATES/REVISIONS
User.13: TOP VIEW
User.22: THE INFORMATION HEREIN IS PROPRIETARY TO CYPRESS | SAN JOSE, CA
User.27: Schematic update,the carrier module | pin names and connection changed | CLEU032 | 2.0 | 10/19/17 | Charles Leung | ISJP | CLEU
User.45: FIGURE | SIZE | 0.2 | 0.381 | 0.762 | 1.016 | DRILL CHART: TOP to BOTTOM | ALL UNITS ARE IN MILLIMETERS | TOLERANCE | +0.05/-0.05 | +0.0762/-0.0762 | PLATED | NON-PLATED | QTY | 252 | 109 | 2
